# Altium PCB 2014_IHM.PcbDoc
Units mil, origin at the board's own origin, x right, y up, seen from the top; angles counter-clockwise.
Board outline 3543.31 x 2165.35 mil, 4 copper layers (1-TOP, 2-GND, 3-SIGNAL, 4-BOT); 33 components, 31 nets, 143 pads, 81 vias.
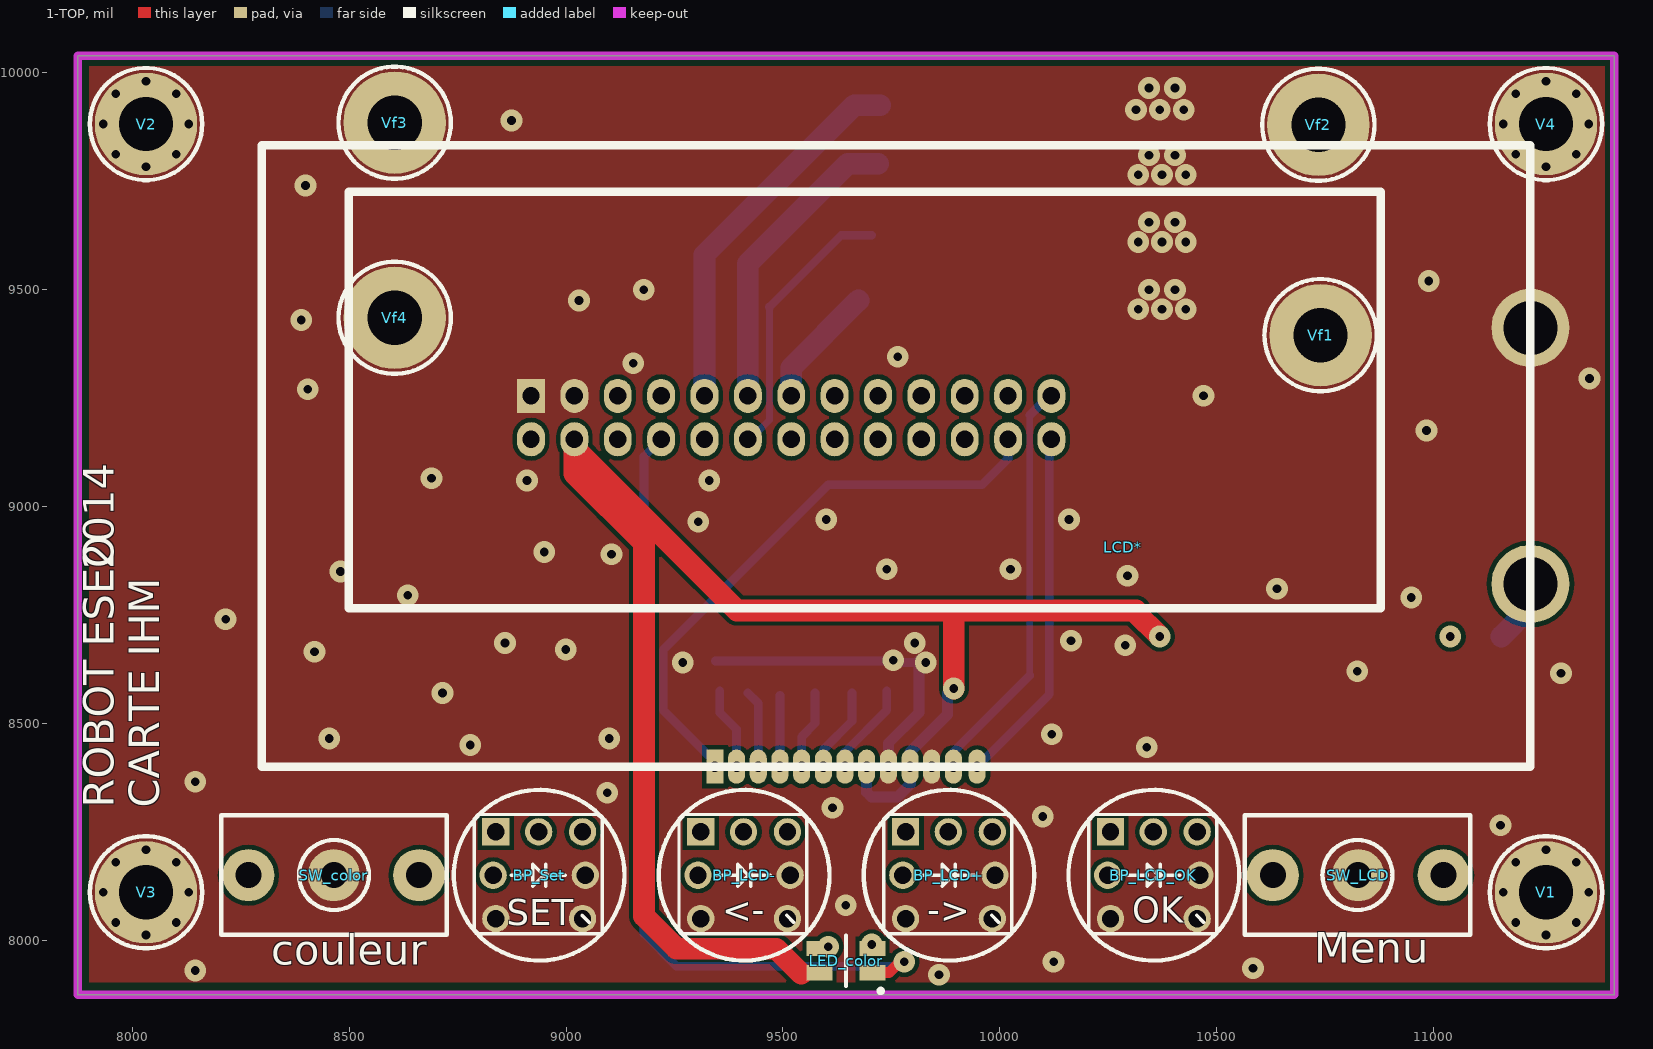
[diagram p0: 1-TOP view]
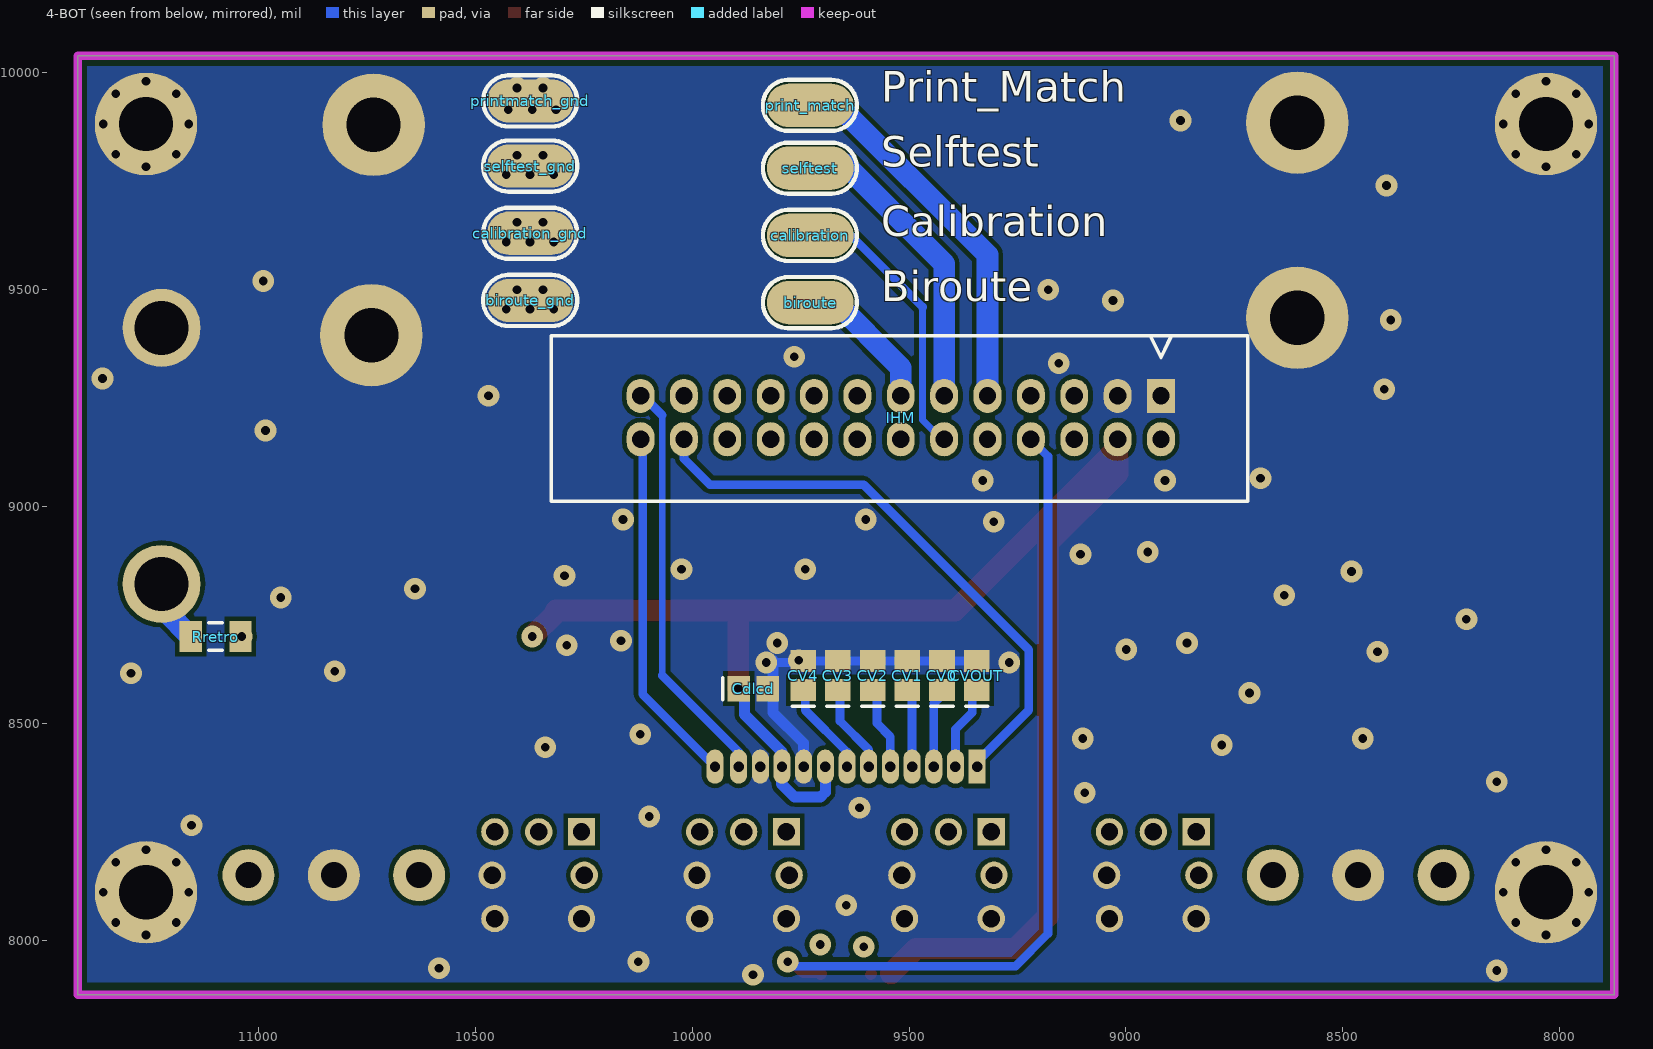
[diagram p1: 4-BOT view, seen from below]
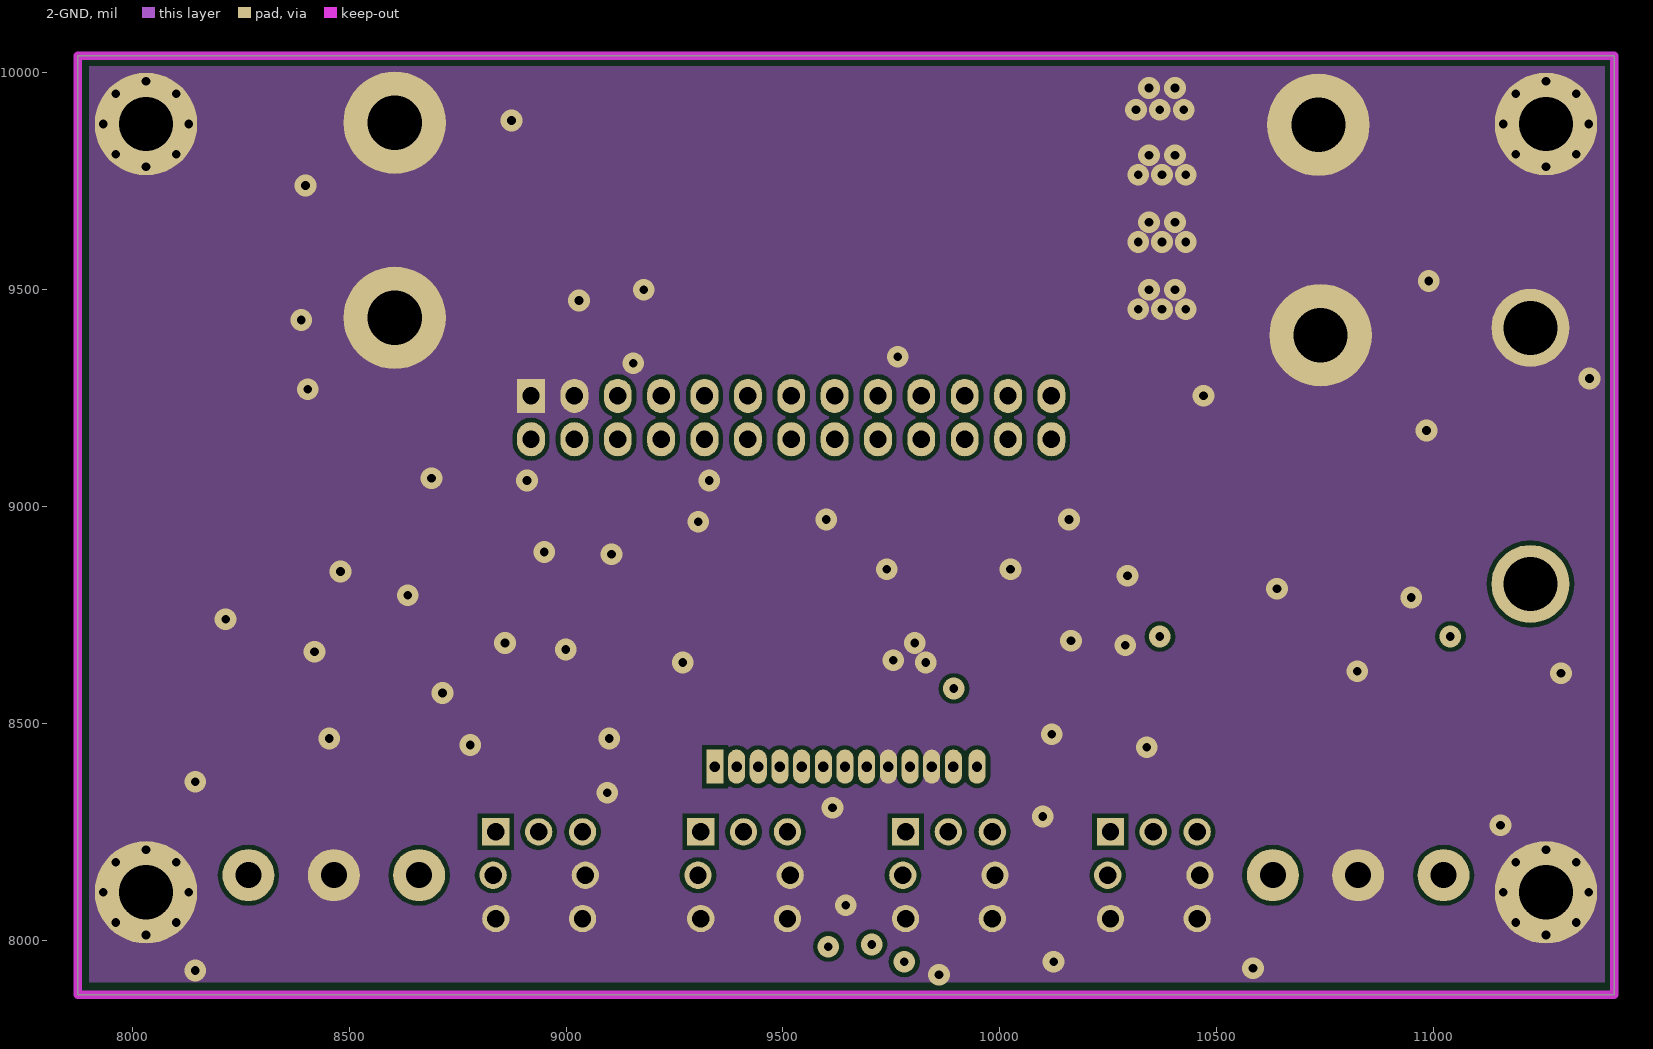
[diagram p2: 2-GND]
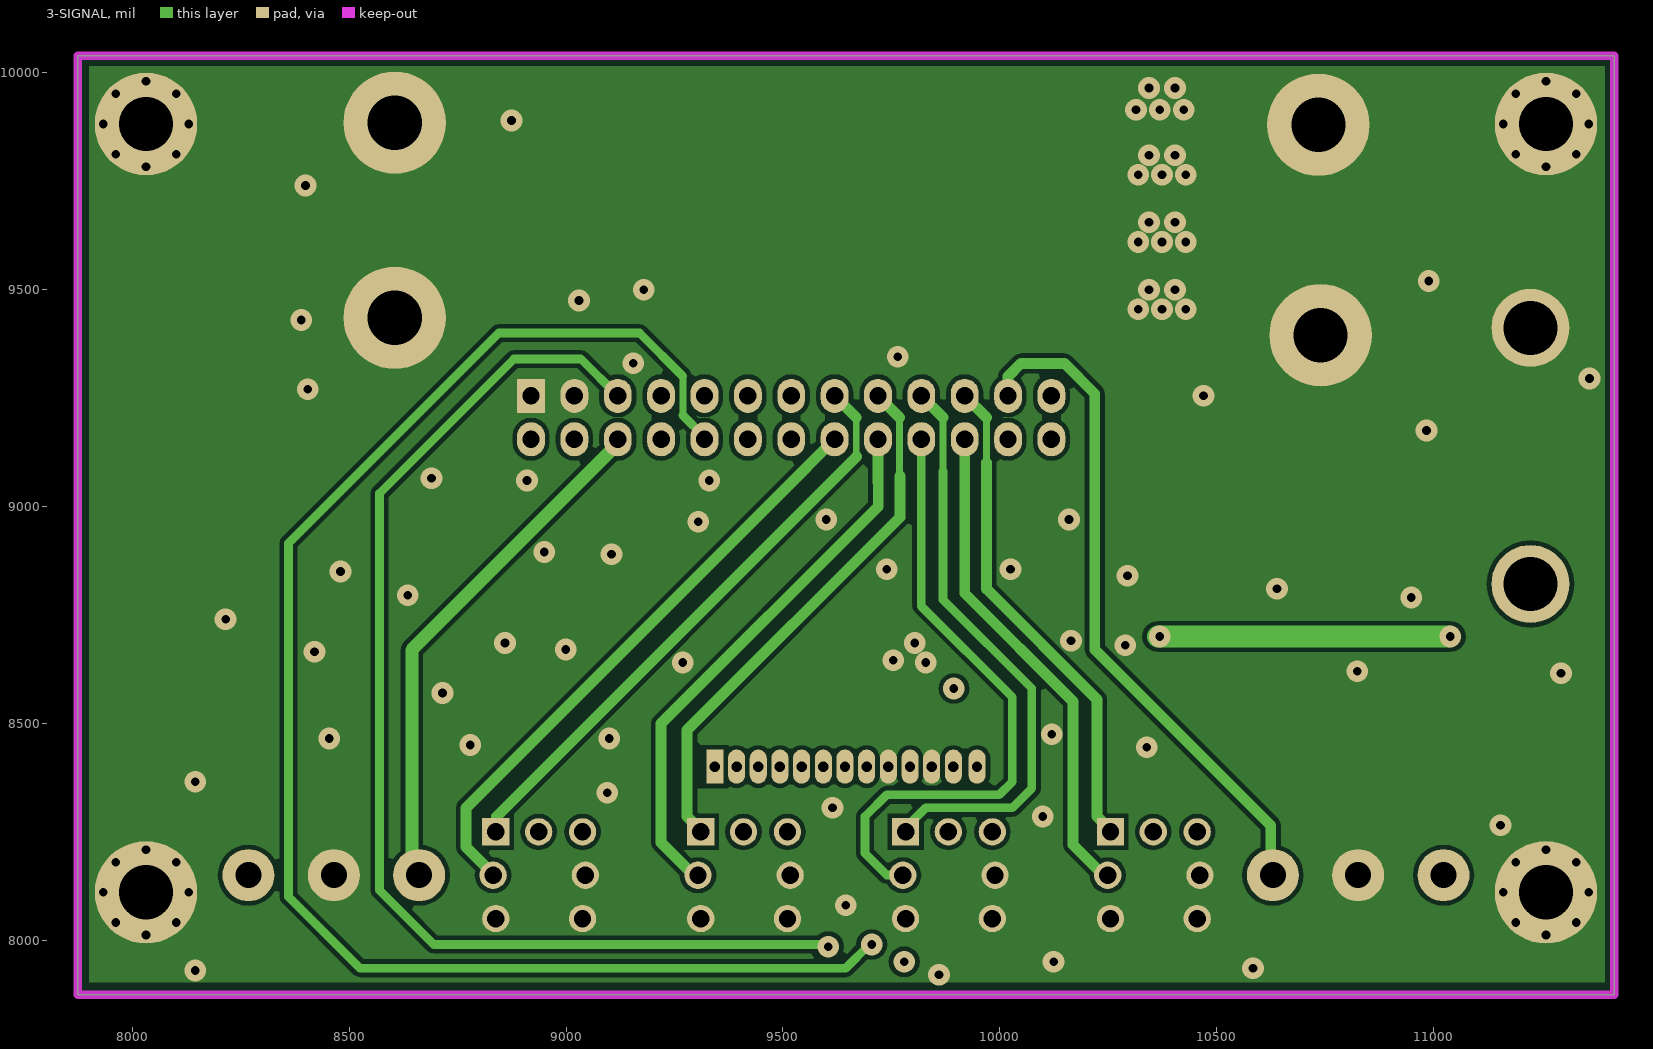
[diagram p3: 3-SIGNAL]
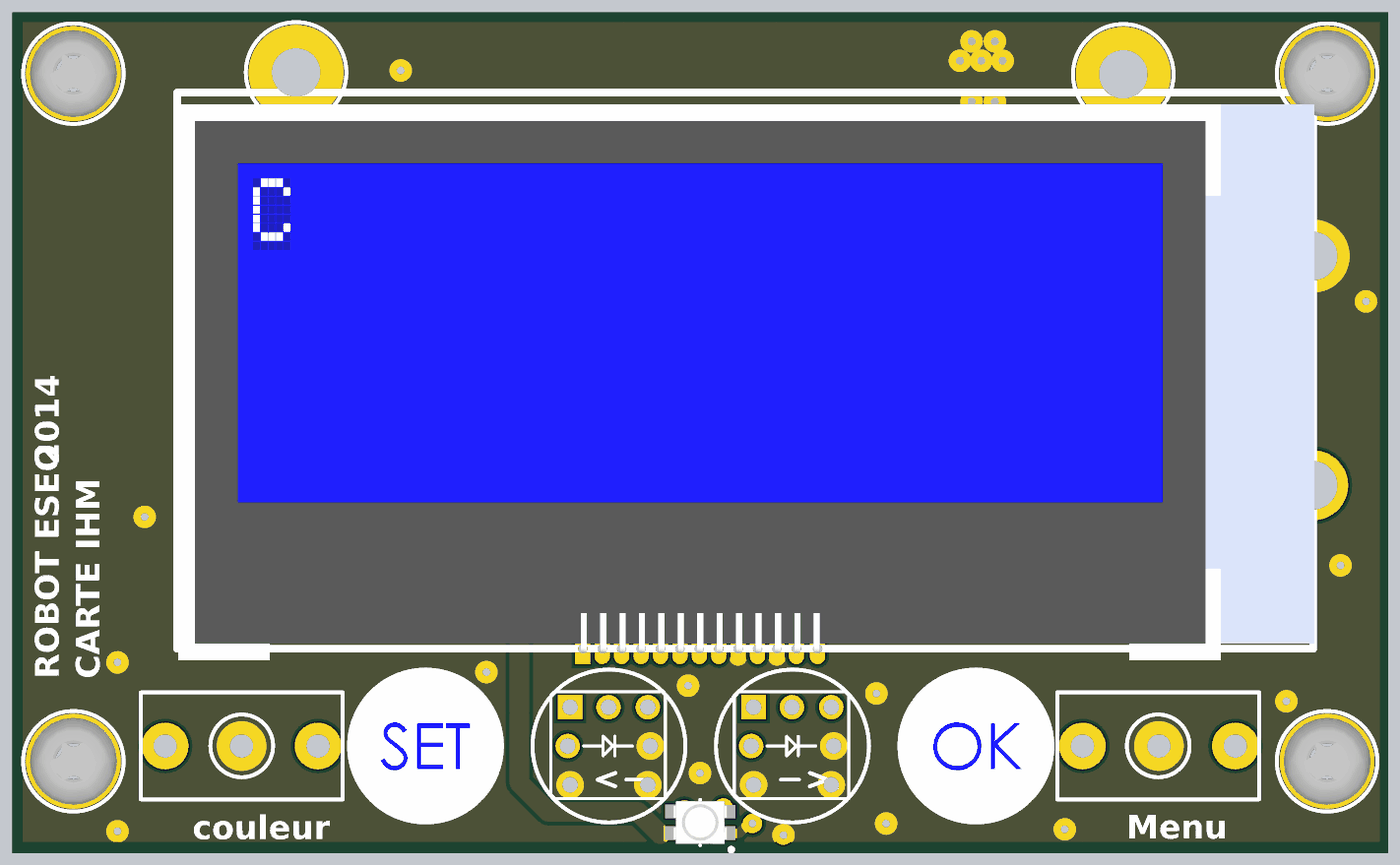
[diagram p4: 3D render of the assembled board from above, using the file's embedded part models]
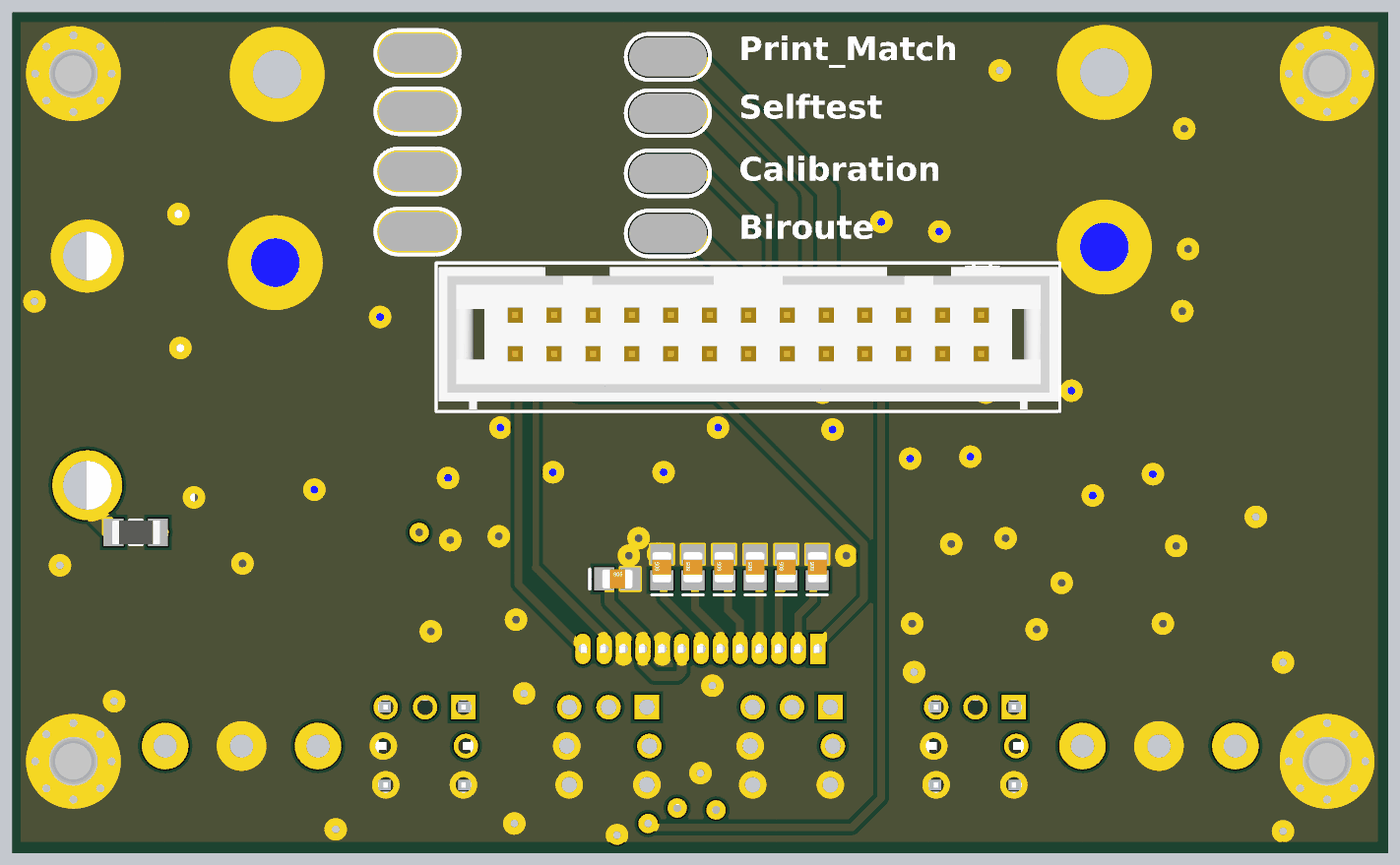
[diagram p5: 3D render of the assembled board from below, using the file's embedded part models]

## Layer stack, top to bottom
1-TOP: signal copper 1.4
Dielectric: core 12.6, FR-4, Dk 4.8
2-GND: signal copper 1.4
Dielectric: prepreg 12.6, FR-4, Dk 4.8
3-SIGNAL: signal copper 1.4
Dielectric: core 12.6, FR-4, Dk 4.8
4-BOT: signal copper 1.4

## Board outline
7874.02,7874.02 11417.32,7874.02 11417.32,10039.37 7874.02,10039.37

## Design rules (kind name [scope] priority, off if disabled: settings)
Clearance Clearance_1 [InNamedPolygon('2-GND') Or  InNamedPolygon('3-GND') Or  InNamedPolygon('1-GND') Or  InNamedPolygon('4-GND')] p1: gap=10
Clearance [All] p2: gap=8
FabricationTestpoint [(IsPad And (OnTopLayer Or OnBottomLayer))] p1: side=3 testpointundercomponent=TRUE minsize=40 maxsize=100 preferedsize=60 minholesize=0 maxholesize=40 preferedholesize=32 testpointgrid=1 allowsidetop=TRUE allowsidebottom=TRUE usegrid=TRUE gridtolerance=0.01
HoleSize [All] p1: absolutevalues=TRUE maxlimit=200 minlimit=1 maxpercent=80.000 minpercent=20.000
PlaneConnect [All] p1: planeconnectstyle=Direct reliefexpansion=20 reliefentries=4 reliefconductorwidth=10 reliefairgap=10
PolygonConnect [All] p1: connectstyle=Direct reliefconductorwidth=10 reliefentries=4 polygonreliefangle="90 Angle"
RoomDefinition 2014_IHM [InComponentClass('2014_IHM')] p1: confinementstyle=ConfineIn formatcopy=TRUE lockcomponents=FALSE outline 12644.37,8475 12114.37,8475 12114.37,9025 12644.37,9025
RoutingVias [All] p1: holewidth=28 width=50 viastyle="Through Hole" minholewidth=28 minwidth=50 maxholewidth=28 maxwidth=50
SilkscreenOverComponentPads [All] p1: minsilkscreentomaskgap=10
SolderMaskExpansion [All] p1: expansion=4
Width [All] p1: maxlimit=200 minlimit=10 preferedwidth=15
24 further rules are at their usual default settings.

## Components (designator, comment, footprint, x,y, rotation, side; value= is the part's Value field where it differs from the comment)
biroute "Pad_M3" PAD_CMS_5.08x2.54 9728.37,9470 r0 bottom
biroute_gnd "Pad_M3" PAD_CMS_5.08x2.54 10373.37,9475 r0 bottom
BP_LCD+ "pushbutton_led" PUSHBUTTON_LED_FlecheDroite 9783.07,8249.61 r0 top
BP_LCD- "pushbutton_led" PUSHBUTTON_LED_FlecheGauche 9310.63,8249.61 r0 top
BP_LCD_OK "pushbutton_led" PUSHBUTTON_LED_OK 10255.51,8249.61 r0 top
BP_Set "pushbutton_led" PUSHBUTTON_LED_SET 8838.19,8249.61 r0 top
calibration "Pad_M3" PAD_CMS_5.08x2.54 9728.37,9625 r0 bottom
calibration_gnd "Pad_M3" PAD_CMS_5.08x2.54 10373.37,9630 r0 bottom
Cdlcd "10uF" C0805_N 9859.37,8580 r180 bottom
CV0 "1uF" C0805_N 9424.37,8610 r90 bottom
CV1 "1uF" C0805_N 9504.37,8610 r90 bottom
CV2 "1uF" C0805_N 9584.37,8610 r90 bottom
CV3 "1uF" C0805_N 9664.37,8610 r90 bottom
CV4 "1uF" C0805_N 9744.37,8610 r90 bottom
CVOUT "1uF" C0805_N 9344.37,8610 r90 bottom
IHM "BARRETTE13X2" HE10/26_M_D_BP 8919.37,9155 r0 bottom
LCD* "MCCOG42005A6W-BNMLWI" LCD_4X20_MIDAS 8298.82,8400 r0 top locked
LED_color "150141M173100" 3528 9645.67,7952.76 r180 top
print_match "Pad_M3" PAD_CMS_5.08x2.54 9728.37,9925 r0 bottom
printmatch_gnd "Pad_M3" PAD_CMS_5.08x2.54 10373.37,9935 r0 bottom
Rretro "33R" R1206_N 11099.37,8700 r180 bottom
selftest "Pad_M3" PAD_CMS_5.08x2.54 9728.37,9780 r0 bottom
selftest_gnd "Pad_M3" PAD_CMS_5.08x2.54 10373.37,9785 r0 bottom
SW_color "25436NAH" "SW_UNIPOL_DROIT - APEM 523X B"#1 8465,8150 r90 top
SW_LCD "25436NAH" "SW_UNIPOL_DROIT - APEM 523X B"#2 10825,8150 r270 top
V1 "Pad_M3" M3x6mm#1 11259.84,8110.24 r0 top locked
V2 "Pad_M3" M3x6mm#1 8031.5,9881.89 r0 top locked
V3 "Pad_M3" M3x6mm#1 8031.5,8110.24 r0 top locked
V4 "Pad_M3" M3x6mm#1 11259.84,9881.89 r0 top locked
Vf1 "Pad_M3" M3x6mm#2 10740,9395 r0 top
Vf2 "Pad_M3" M3x6mm#2 10735,9880 r0 top
Vf3 "Pad_M3" M3x6mm#2 8605,9885 r0 top
Vf4 "Pad_M3" M3x6mm#2 8605,9435 r0 top

## Footprints (in the part's own frame and the unit in brackets; to place one, negate y for a bottom-side part, rotate by r counter-clockwise, add the part's x,y. Pads: shape width x height; smd on the part's side, far side on the other; paste and mask are expansions set on the pad)
3528 [mm] "Chip LED, 4-Leads, Body 2.8x3.5mm (max), Pitch 1.42mm, IPC Medium Density"
  rect 1.5x0.9 smd: 1(1.55,0.707) 2(1.55,-0.71) 3(-1.55,0.707) 4(-1.55,-0.707)
  silkscreen extent -2.16,-1.5 0.03,1.9, body extent -1.75,-1.4 1.75,1.4, height 1.87
C0805_N [mm] "Chip Capacitor, Body 2.0x1.3mm, IPC Medium Density"
  rect 1.3x1.5 smd: 1(-0.85,0) 2(0.85,0)
  silkscreen extent -1.8,-0.65 -1.8,0.65, body extent -0.99,-0.63 1.01,0.63, height 0.8
HE10/26_M_D_BP [mm] "HE10 ; 26 CONTACTS ; MALE ; DROIT; BAS PROFIL ; ESPACEMENTS BROCHES = 2.54 mm"
  rect 1.63x2 hole 1.016: 1(0,-2.54)
  oval 1.63x2 hole 1.016: 2(0,0) 3(2.54,-2.54) 4(2.54,0) 5(5.08,-2.54) 6(5.08,0) 7(7.62,-2.54) 8(7.62,0) 9(10.16,-2.54) 10(10.16,0) 11(12.7,-2.54) 12(12.7,0) 13(15.24,-2.54) 14(15.24,0) 15(17.78,-2.54) 16(17.78,0) 17(20.32,-2.54) 18(20.32,0) 19(22.86,-2.54) 20(22.86,0) 21(25.4,-2.54) 22(25.4,0) 23(27.94,-2.54) 24(27.94,0) 25(30.48,-2.54) 26(30.48,0)
  silkscreen extent -5.08,-6.07 35.72,3.64, body extent -4.96,-5.9 35.56,3.5, height 8.8
LCD_4X20_MIDAS [mm] "MCCOG42005A6W-BNMLWI"
  rect 1x2 hole 0.61: 1(26.53,0)
  oval 1x2 hole 0.61: 2(27.8,0) 3(29.07,0) 4(30.34,0) 5(31.61,0) 6(32.88,0) 7(34.15,0) 8(35.42,0) 9(36.69,0) 10(37.96,0) 11(39.23,0) 12(40.5,0) 13(41.884,0)
  round 4.572 hole 3.175: A(74.3,10.7) K(74.3,25.7)
  silkscreen extent 0,0 74.3,36.4, body extent 0.06,-0.76 74.36,35.64, height 5.93
M3x6mm#1 [mm] "Vis M3 X 6mm _TORX_Tête 6mm"
  round 0.8 hole 0.508: 1(-2.5,0) 1(-1.768,-1.768) 1(-1.768,1.768) 1(0,-2.5) 1(0,2.5) 1(1.768,-1.768) 1(1.768,1.768) 1(2.5,0)
  round 6 hole 3.175: 1(0,0)
  silkscreen extent -3.29,-3.28 3.29,3.28, body extent -2.84,-2.85 2.86,2.85, height 1.67
M3x6mm#2 [mm] "Vis M3 X 6mm"
  round 6 hole 3.175: 1(0,0)
  silkscreen extent -3.29,-3.28 3.29,3.28
PAD_CMS_5.08x2.54 [mil] "Pad pour souder un fil"
  oval 200x100 smd paste+0.2: 1(0,0)
  silkscreen extent -108,-59 109,59, body extent -85,-30 84,30, height 10
PUSHBUTTON_LED_FlecheDroite [mm]
  round 1.6 hole 1.016: 0(2.507,0) 2(5.08,0) 3(0,-5.08) 4(5.08,-5.08) 5(-0.16,-2.54) 6(5.24,-2.54)
  rect 1.6x1.6 hole 1.016: 1(0,0)
  silkscreen extent -2.46,-7.54 7.54,2.46, body extent -2.46,-7.54 7.54,2.46, height 10.02
PUSHBUTTON_LED_FlecheGauche [mm]
  round 1.6 hole 1.016: 0(2.507,0) 2(5.08,0) 3(0,-5.08) 4(5.08,-5.08) 5(-0.16,-2.54) 6(5.24,-2.54)
  rect 1.6x1.6 hole 1.016: 1(0,0)
  silkscreen extent -2.46,-7.54 7.54,2.46, body extent -2.46,-7.54 7.54,2.46, height 10.02
PUSHBUTTON_LED_OK [mm]
  round 1.6 hole 1.016: 0(2.507,0) 2(5.08,0) 3(0,-5.08) 4(5.08,-5.08) 5(-0.16,-2.54) 6(5.24,-2.54)
  rect 1.6x1.6 hole 1.016: 1(0,0)
  silkscreen extent -2.46,-7.54 7.54,2.46, body extent -2.46,-7.54 7.54,2.46, height 10.02
PUSHBUTTON_LED_SET [mm]
  round 1.6 hole 1.016: 0(2.507,0) 2(5.08,0) 3(0,-5.08) 4(5.08,-5.08) 5(-0.16,-2.54) 6(5.24,-2.54)
  rect 1.6x1.6 hole 1.016: 1(0,0)
  silkscreen extent -2.46,-7.54 7.54,2.46, body extent -2.46,-7.54 7.54,2.46, height 10.02
R1206_N [mm] "Chip Resistor, Body 3.2x1.6mm, IPC Medium Density"
  rect 1.3x1.8 smd: 1(-1.45,0) 2(1.45,0)
  silkscreen extent -0.4,-0.8 0.4,0.8, body extent -1.68,-0.87 1.68,0.87, height 0.71
"SW_UNIPOL_DROIT - APEM 523X B"#1 [mil]
  round 120 hole 60: COMMON1(-0.39,0.43) NC1(-0.39,197.28) NO1(-0.39,-196.42)
  silkscreen extent -138,-260 138,260
"SW_UNIPOL_DROIT - APEM 523X B"#2 [mil]
  round 120 hole 60: COMMON1(0.39,1.77) NC1(0.39,198.62) NO1(0.39,-195.08)
  silkscreen extent -138,-260 138,260

## Part data
biroute biroute_gnd calibration calibration_gnd print_match printmatch_gnd selftest selftest_gnd V1 V2 V3 V4 Vf1 Vf2 Vf3 Vf4: library part "Vis M3 X 6mm _TORX_Tête 6mm", "Vis M3 X 6mm _TORX_Tête 6mm"
Cdlcd CV0 CV1 CV2 CV3 CV4 CVOUT: library part Condensateur, "Capacitor"
IHM: "Header, 13-Pin, Dual row"
LCD*: library part LCD_MIDAS_4x20
LED_color: library part "WL-SFTW 3528 150141M173100", "SMD Full-Color Top LED, WL-SFTW, Red & Green & Blue"
Rretro: library part Resistor, "Resistor"
SW_color SW_LCD: library part "SW SPDT- APEM Série 523x", "Switch unipolaire a levier"

## Via types
v1: diameter 50, hole 20, 1-TOP to 4-BOT, 81 vias

## Nets (pads, with @x,y where several pads share a name; then routed paths per layer and width w, separated by ;. In a path a pad name is that pad's centre, name@x,y a point inside that pad or via, vN(x,y) a via of type N, cw(c..) or ccw(c..) an arc to the next point about the centre after c; other vN are vias at no path point)
3V_STR: IHM.2
5V: Cdlcd.1 IHM.4 LCD*.8 LCD*.10 LED_color.1 Rretro.2 | length 4390.4
  1-TOP w25: LED_color.1@9587.22,7922.15 LED_color.1@9589.37,7920
  1-TOP w50: IHM.4 IHM.4@9019.37,9135 ; 9542.5,7922.5 9485,7980 9255,7980 9180,8055 9180,8915 9019.37,9075.63 IHM.4@9019.37,9135 ; v1(9894.37,8580) 9894.37,8755 ; 10314.37,8755 v1@10366.87,8702.5 ; 10314.37,8760 9394.37,8760 IHM.4@9019.37,9135
  3-SIGNAL w30: IHM.4@9015,9150.63 IHM.4
  3-SIGNAL w50: v1@10364.37,8700 v1(10369.37,8700) v1@11034.37,8700
  4-BOT w25: LCD*.8 9693.31,8341.06 9704.37,8330 9764.37,8330 9794.37,8360 LCD*.10@9794.37,8405 ; LCD*.10 9793.31,8433.94 9879.37,8520 Cdlcd.1@9879.37,8570
  other v1: 11039.37,8700
GND: biroute_gnd.1 BP_LCD+.3 BP_LCD+.4 BP_LCD+.6 BP_LCD-.3 BP_LCD-.4 BP_LCD-.6 BP_LCD_OK.3 BP_LCD_OK.4 BP_LCD_OK.6 BP_Set.3 BP_Set.4 BP_Set.6 calibration_gnd.1 Cdlcd.2 CV0.2 CV1.2 CV2.2 CV3.2 CV4.2 CVOUT.2 IHM.1 IHM.3 LCD*.9 LCD*.11 LCD*.K printmatch_gnd.1 selftest_gnd.1 SW_color.COMMON1 SW_LCD.COMMON1 V1.1 V2.1 V3.1 V4.1 Vf1.1 Vf2.1 Vf3.1 Vf4.1 | length 745.9
  4-BOT w20: CVOUT.2 CV0.2 CV1.2 CV2.2 CV3.2 CV4.2 9747.83,8640 v1@9814.37,8640
  4-BOT w25: LCD*.9 9743.31,8453.94 9814.37,8525 v1@9814.37,8645
  other v1: 9860,7920 8145,7930 10584.37,7935 10124.37,7950 9645,8080 11155,8265 10099.37,8285 9614.37,8305 9095,8340 8145,8365 10339.37,8445 8779.37,8450 8454.37,8465 9100,8465 10120,8475 8715,8570 11294.37,8615 10824.37,8620 9269.37,8640 9829.37,8640 9754.37,8645 8420,8665 8999.37,8670 10289.37,8680 8859.37,8685 9804.37,8685 10164.37,8690 8215,8740 10949.37,8790 8635,8795 10639.37,8810 10295,8840 8480,8850 9740,8855 10025,8855 9105,8890 8950,8895 9305,8965 9600,8970 10160,8970 8910,9060 9330,9060 8690,9065 10984.37,9175 10470,9255 8404.37,9270 11360,9295 9155,9330 9765,9345 8389.37,9430 10319.37,9455 10374.37,9455 10429.37,9455 9030,9475 9179.37,9500 10344.37,9500 10404.37,9500 10989.37,9520 10319.37,9610 10374.37,9610 10429.37,9610 10344.37,9655 10404.37,9655 8399.37,9740 10319.37,9765 10374.37,9765 10429.37,9765 10344.37,9810 10404.37,9810 8874.37,9890 10314.37,9915 10369.37,9915 10424.37,9915 10344.37,9965 10404.37,9965
NetCV0_1: CV0.1 LCD*.3 | length 179.9
  4-BOT w20: CV0.1@9419.37,8570 9443.31,8546.06 LCD*.3
NetCV1_1: CV1.1 LCD*.4 | length 163.9
  4-BOT w20: LCD*.4 CV1.1@9493.31,8563.94
NetCV2_1: CV2.1 LCD*.5 | length 182.9
  4-BOT w20: LCD*.5 9543.31,8468.94 9574.37,8500 CV2.1@9574.37,8570
NetCV3_1: CV3.1 LCD*.6 | length 197.4
  4-BOT w20: LCD*.6 9593.31,8438.94 9659.37,8505 CV3.1@9659.37,8570
NetCV4_1: CV4.1 LCD*.7 | length 214.8
  4-BOT w20: LCD*.7 9643.31,8433.94 9739.37,8530 CV4.1@9739.37,8575
NetCVOUT_1: CVOUT.1 LCD*.2 | length 191.1
  4-BOT w20: CVOUT.1@9354.37,8575 9354.37,8525 9393.31,8486.06 LCD*.2
NetLCD*_A: LCD*.A Rretro.1 | length 144
  4-BOT w50: Rretro.1 11214.37,8757.91 LCD*.A@11214.37,8820
PRO_BP_CALIBRATION: calibration.1 IHM.12 | length 619.7
  4-BOT w16: IHM.12@9430,9160 9469.37,9199.37 9469.37,9460
  4-BOT w20: 9469.37,9460 9634.37,9625 calibration.1@9704.37,9625
STR_IHM_BIROUTE: biroute.1 IHM.13 | length 284.2
  4-BOT w50: IHM.13 9519.37,9320 biroute.1@9674.37,9475
STR_IHM_BP_MENU_LCD+: BP_LCD+.1 IHM.19 | length 1338.5
  3-SIGNAL w16: 9869.37,9080 9869.37,9080.63 9869.37,9205
  3-SIGNAL w20: BP_LCD+.1@9784.37,8260 9829.37,8305 10029.37,8305 10074.37,8350 10074.37,8580 9869.37,8785 9869.37,9080.63
  3-SIGNAL w25: IHM.19 9869.37,9205
STR_IHM_BP_MENU_LCD-: BP_LCD-.1 IHM.17 | length 1276.4
  3-SIGNAL w16: 9769.37,9030 9769.37,9205
  3-SIGNAL w25: BP_LCD-.1@9309.37,8255 9279.37,8285 9279.37,8484.37 9770,8975 9770,9070 ; IHM.17 9769.37,9205
STR_IHM_BP_MENU_LCD_OK: BP_LCD_OK.1 IHM.21 | length 1127.3
  3-SIGNAL w16: 9969.37,9105 9969.37,9205
  3-SIGNAL w25: IHM.21 9969.37,9205 ; 9969.37,9100.63 9969.37,8810 10224.37,8555 10224.37,8285 BP_LCD_OK.1@10249.37,8260
STR_IHM_BP_PRINT_MATCH: IHM.9 print_match.1 | length 872.9
  4-BOT w50: IHM.9 9319.37,9580 9664.37,9925 print_match.1@9724.37,9925
STR_IHM_BP_SELFTEST: IHM.11 selftest.1 | length 695.3
  4-BOT w50: IHM.11@9419.37,9260 9419.37,9560 9649.37,9790 selftest.1@9719.37,9790
STR_IHM_BP_SET: BP_Set.1 IHM.15 | length 1360.4
  3-SIGNAL w16: 9669.37,9114.37 9669.37,9205
  3-SIGNAL w25: BP_Set.1@8839.37,8260 8839.37,8284.37 9669.37,9114.37 9670,9115 ; IHM.15 9669.37,9205
STR_IHM_LCD_RESET: IHM.24 LCD*.1 | length 1331.6
  4-BOT w20: LCD*.1@9344.37,8410 9224.37,8530 9224.37,8669.37 9605,9050 9959.37,9050 10019.37,9110 IHM.24
STR_IHM_LED_BLUE: IHM.5 LED_color.2 | length 2714.8
  3-SIGNAL w20: IHM.5 9034.37,9340 8880,9340 8570,9030 8570,8115 8695,7990 v1@9605,7990
  other v1: 9605,7985
STR_IHM_LED_GREEN: IHM.10 LED_color.4 | length 3563.5
  3-SIGNAL w16: 9269.37,9210 9269.37,9300
  3-SIGNAL w20: 9269.37,9210 9319.37,9160 IHM.10 ; 9269.37,9300 9169.37,9400 8845,9400 8360,8915 8360,8100 8525,7935 9645,7935 v1@9700,7990
  other v1: 9705,7990
STR_IHM_LED_IHM+: BP_LCD+.5 IHM.20 | length 1435.2
  3-SIGNAL w20: BP_LCD+.5@9774.37,8150 9739.37,8150 9689.37,8200 9689.37,8285 9739.37,8335 9999.37,8335 10029.37,8365 10029.37,8560 9819.37,8770 ; 9819.37,8775.63 IHM.20
STR_IHM_LED_IHM-: BP_LCD-.5 IHM.18 | length 1262.6
  3-SIGNAL w25: BP_LCD-.5@9304.37,8140 9219.37,8225 9219.37,8499.37 9720,9000 9720,9060 ; 9719.37,9055 IHM.18
STR_IHM_LED_IHM_OK: BP_LCD_OK.5 IHM.22 | length 1184
  3-SIGNAL w25: 9919.37,9095 IHM.22@9919.37,9134.37 ; IHM.22 IHM.22@9919.37,9134.37 ; BP_LCD_OK.5@10244.37,8145 10169.37,8220 10169.37,8550 9919.37,8800 IHM.22@9919.37,9134.37
STR_IHM_LED_IHM_SET: BP_Set.5 IHM.16 | length 1384.3
  3-SIGNAL w25: BP_Set.5@8829.37,8155 8769.37,8215 8769.37,8304.37 9500.31,9035.31 ; 9495,9030 IHM.16
STR_IHM_LED_RED: IHM.8 LED_color.3 | length 1847
  1-TOP w25: LED_color.3@9702.22,7922.15 LED_color.3@9704.37,7920 ; LED_color.3 9744.9,7924.9 v1@9765,7945
  4-BOT w20: IHM.8 9219.37,9154.37 9180,9115 9180,8015 9255,7940 v1@9770,7940
  other v1: 9780,7950
STR_IHM_SCL: IHM.25 LCD*.12 | length 946.6
  4-BOT w16: 10069.37,8610 10069.37,9210
  4-BOT w20: LCD*.12 9893.31,8433.94 10069.37,8610 ; 10069.37,9210 IHM.25@10114.37,9255
STR_IHM_SDA: IHM.26 LCD*.13 | length 814
  4-BOT w20: LCD*.13 10114.37,8566.57 IHM.26@10114.37,9145
STR_IHM_SW_COLOR: IHM.6 SW_color.NO1 | length 1190.5
  3-SIGNAL w30: SW_color.NO1@8644.37,8150.63 8644.37,8669.37 IHM.6@9119.37,9144.37
STR_IHM_SW_LCD: IHM.23 SW_LCD.NO1 | length 1574.4
  3-SIGNAL w25: IHM.23 10019.37,9300 10049.37,9330 10149.37,9330 10219.37,9260 10219.37,8670 10625,8264.37 SW_LCD.NO1@10625,8140
STR_PB2_RFU: IHM.7
pads on no net: BP_LCD+.0 BP_LCD+.2 BP_LCD-.0 BP_LCD-.2 BP_LCD_OK.0 BP_LCD_OK.2 BP_Set.0 BP_Set.2 IHM.14 SW_color.NC1 SW_LCD.NC1

## Polygon pours and split planes (outlines as drawn)
GND on 4-BOT "4-GND" (solid, pour order 1000): 7900.69,10015 11395,10015 11395,7902.31 7900.69,7902.31
GND on 3-SIGNAL "3-GND" (solid, pour order 1001): 7900.69,10015 11395,10015 11395,7902.31 7900.69,7902.31
GND on 2-GND "2-GND" (solid, pour order 1002): 7900.69,10015 11395,10015 11395,7902.31 7900.69,7902.31
GND on 1-TOP "1-GND" (solid, pour order 1003): 7900.69,10015 11395,10015 11395,7902.31 7900.69,7902.31

## Keep-outs
Keep-Out Layer:
  the board outline again, w20

## Silkscreen, mask and mechanical layers (free items; w line width, h text height)
Top Overlay:
  text "2014" at 7980,8855 h120 r90
  text "ROBOT ESEO" at 7980,8305 h120 r90
  text "CARTE IHM" at 8085,8305 h120 r90
  text "Menu" at 10725,7925 h120
  text "couleur" at 8320,7920 h120
Bottom Overlay:
  text "Print_Match" at 9564.37,9910 h120
  text "Selftest" at 9564.37,9760 h120
  text "Calibration" at 9564.37,9600 h120
  text "Biroute" at 9564.37,9450 h120

## Dimensions
11417.32,7874.02 to 9947.8,8400 on Mechanical 15
7874.02,10039.37 to 8919.37,9255 on Mechanical 15
11417.32,7874.02 to 10826.77,8149.61 on Mechanical 15
10826.77,8149.61 to 9645.67,7933.07 on Mechanical 15
9645.67,7972.44 to 8464.57,8149.61 on Mechanical 15
8464.57,8149.61 to 7874.02,7874.02 on Mechanical 15
7874.02,10039.37 to 8031.5,9881.89 on Mechanical 15
8031.5,9881.89 to 7874.02,10039.37 on Mechanical 15
11417.32,10039.37 to 11417.32,7874.02 on Mechanical 15
11417.32,10039.37 to 7874.02,10039.37 on Mechanical 15
8031.5,8110.24 to 7874.02,7874.02 on Mechanical 15
8031.5,8110.24 to 7874.02,7874.02 on Mechanical 15
8031.5,8110.24 to 7421.05,8720.68 on Mechanical 15

## Text inside footprints (layer, text, board x,y; h text height)
BP_LCD+: Top Overlay "->" at 9833.07,8039.61 h60
BP_LCD-: Top Overlay "<-" at 9360.63,8039.61 h60
BP_LCD_OK: Top Overlay "OK" at 10305.51,8039.61 h60
BP_Set: Top Overlay "SET" at 8863.19,8034.61 h60